# Altium PCB SP1100RS_V5.0.1.PcbDoc (part 2 of 2)
Units mm, origin at the board's own origin, x right, y up, seen from the top; angles counter-clockwise.
Board outline 126.12 x 87.13 mm, 4 copper layers (TopLayer, GND, PWR, BottomLayer); 167 components, 107 nets, 539 pads, 176 vias.
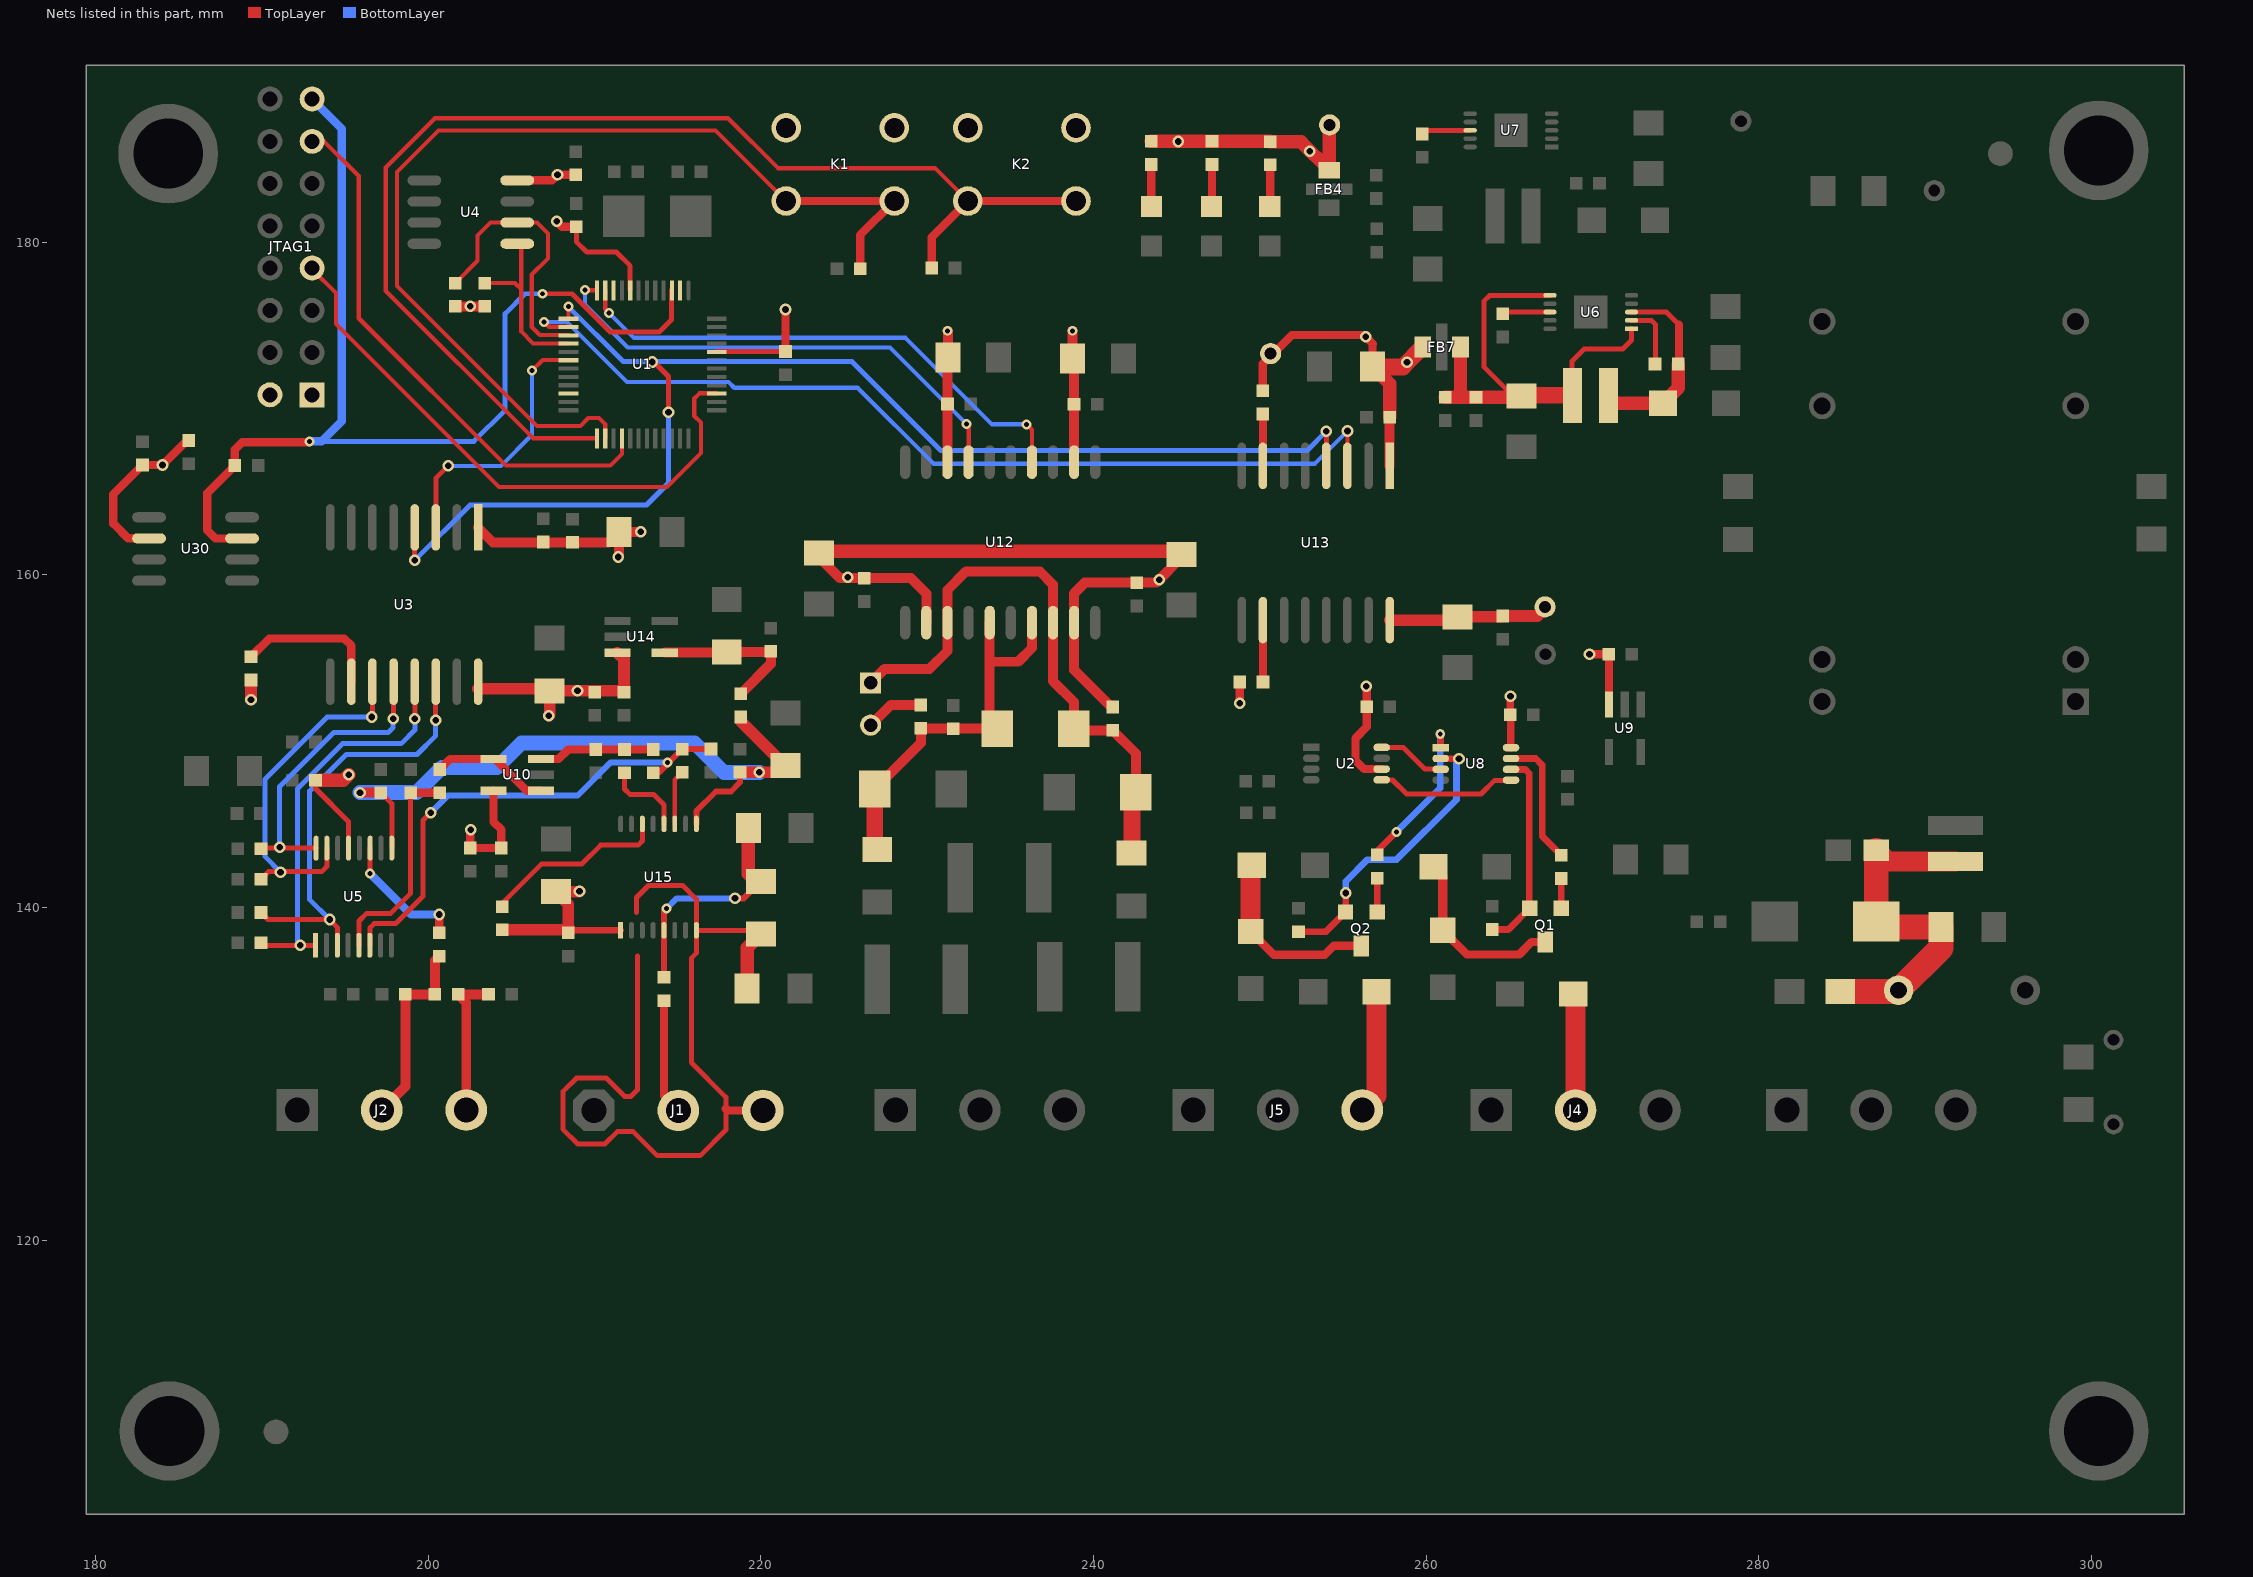
[diagram p4: the nets of this part, all layers, seen from the top]

## Via types
v1: diameter 0.7, hole 0.4, TopLayer to BottomLayer, 140 vias
v2: diameter 0.6, hole 0.3, TopLayer to BottomLayer, 32 vias
v3: diameter 1, hole 0.6, TopLayer to BottomLayer, 4 vias

## Nets (pads, with @x,y where several pads share a name; then routed paths per layer and width w, separated by ;. In a path a pad name is that pad's centre, name@x,y a point inside that pad or via, vN(x,y) a via of type N, cw(c..) or ccw(c..) an arc to the next point about the centre after c; other vN are vias at no path point) (continued)
NetC18_1: C18.1 R19.2 U5.5 | length 13.1
  TopLayer w0.3: U5.5@195.839,137.729 195.839,139.189 196.3,139.65 197.75,139.65 198.95,140.85 C18.1@198.95,146.9
  TopLayer w0.5: C18.1@198.95,146.9 198.953,146.903 R19.2@200.7,146.903
NetC19_1: C19.1 C20.1 FB6.1 U14.4 | length 9.7
  TopLayer w0.6: U14.4@214.225,155.325 217.923,155.325 C19.1@217.95,155.352 220.552,155.352 C20.1@220.6,155.4 220.6,154.65 FB6.1@218.8,152.85
NetC22_1: C22.1 U6.2 | length 4
  TopLayer w0.3: U6.2@272.318,175.306 273.543,175.306 273.805,175.044 C22.1@273.805,172.675
NetC22_2: C22.2 D49.2 L1.1 U6.3 | length 11.8
  TopLayer w0.3: U6.3@272.318,175.806 274.44,175.806 275.202,175.044
  TopLayer w0.5: C22.2@275.202,172.675 275.202,175.044
  TopLayer w0.8: L1.1@270.96,170.775 271.423,170.312 D49.2@274.236,170.312 275.157,171.233 C22.2@275.157,172.675
NetC23_1: C23.1 C51.1 FB7.1 L1.2 U6.1 U6.6 VR3.2 | length 29.5
  TopLayer w0.3: C23.1@265.185,170.8 263.475,172.51 263.475,176.45 263.825,176.8 U6.6@267.45,176.8 ; L1.2@268.775,170.8 268.775,172.85 269.5,173.575 271.825,173.575 272.35,174.1 U6.1@272.35,174.8
  TopLayer w0.8: VR3.2@261.15,170.672 262.997,170.672 C51.1@263,170.675 ; FB7.1@262.065,173.692 262.065,170.685 262.075,170.675 C51.1@263,170.675 ; C23.1@265.725,170.75 265.65,170.675 C51.1@263,170.675
  TopLayer w1: C23.1@265.185,170.8 268.775,170.8 L1.2@268.8,170.775
NetC29_2: C29.2 C30.1 R20.2 U10.3 | length 7
  TopLayer w0.5: U10.3@206.775,148.925 207.85,148.925 208.422,149.497 C29.2@210.075,149.497 210.078,149.5 C30.1@213.525,149.5
NetC30_2: C30.2 C31.1 R25.2 U5.6 | length 29.8
  TopLayer w0.3: U5.6@196.489,137.729 196.489,138.764 196.75,139.025 198.036,139.025 199.675,140.664 199.675,145.225 v1(200.15,145.7)
  TopLayer w0.35: C30.2@213.525,148.103 213.856,148.103 R25.2@215.275,149.522 216.997,149.522 C31.1@217,149.525
  BottomLayer w0.35: v1(200.15,145.7) 201.175,146.725 208.975,146.725 210.975,148.725 v2(214.4,148.725)
NetC32_1: C32.1 C37.1 R24.2 U15.5 | length 14.2
  TopLayer w0.35: R24.2@214.175,135.797 U15.5@214.175,138.625 214.175,139.775 214.325,139.925 v2(214.325,139.95) ; v1(218.45,140.55) 218.977,140.55 219.851,141.424 C32.1@220,141.573
  TopLayer w0.8: C37.1@219.252,144.775 219.252,142.023 C32.1@219.851,141.424
  BottomLayer w0.35: v2(214.325,139.95) 214.325,139.925 214.95,140.55 v1(218.45,140.55)
NetC41_1: C41.1 CA11.1 D3.2 F3.2 L3.1 VR1.1 | length 21.8
  TopLayer w1.2: C41.1@287.065,143.442 287.732,142.775 L3.1@291.825,142.775
  TopLayer w1.5: F3.2@284.898,134.95 288.33,134.95 D3.2@288.405,135.025 290.952,137.572 VR1.1@290.952,138.825 287.375,138.825 CA11.1@287.05,139.15 287.065,139.165 C41.1@287.065,143.442
NetD1_2: D1.2 F1.1 Q1.3 | length 11.1
  TopLayer w0.5: F1.1@261,138.625 262.45,137.175 265.6,137.175 266.345,137.92 Q1.3@267.165,137.92
  TopLayer w0.6: D1.2@260.44,142.447 261,141.888 F1.1@261,138.625
NetD2_2: D2.2 F2.1 Q2.3 | length 11.5
  TopLayer w0.5: F2.1@249.45,138.554 250.854,137.15 253.9,137.15 254.445,137.695 Q2.3@256.098,137.695
  TopLayer w1.2: F2.1@249.45,138.554 249.45,142.482 D2.2@249.515,142.547
NetD4_2: D4.2 J4.2 | length 7
  TopLayer w1.2: D4.2@268.842,134.803 268.986,134.659 J4.2@268.986,127.823
NetD5_2: D5.2 J5.3 | length 7.5
  TopLayer w1.2: J5.3@256.159,127.823 257.017,128.681 D5.2@257.017,134.928
NetF10_1: F10.1 R41.2 T1.1 U12.13 U12.18 ZD14.1 ZD15.1 | length 36.2
  TopLayer w0.6: T1.1@226.6,153.5 227.45,154.35 230.15,154.35 231.22,155.42 U12.13@231.22,157.123 231.22,159.095 232.325,160.2 236.779,160.2 237.57,159.409 U12.18@237.57,157.123 237.57,153.605 238.825,152.35 ZD14.1@238.825,150.75 238.922,150.653 R41.2@241.15,150.653 242.55,149.253 ZD15.1@242.55,146.925 ; F10.1@242.316,142.94 F10.1@242.316,143.29
  TopLayer w1: F10.1@242.316,143.29 242.316,146.691 ZD15.1@242.55,146.925
NetF11_1: F11.1 R42.1 R76.1 U12.15 U12.17 ZD14.2 ZD16.2 | length 24.1
  TopLayer w0.6: ZD16.2@226.85,147.125 229.625,149.9 R76.1@229.625,150.775 ZD14.2@234.2,150.775 ; U12.15@233.76,157.123 233.76,154.95 ; ZD14.2@234.225,150.75 ZD14.2@234.2,150.775 ; U12.17@236.3,157.123 236.3,155.6 235.475,154.775 233.935,154.775 233.76,154.95 ; 233.76,154.95 233.76,151.215 ZD14.2@234.2,150.775
  TopLayer w1: ZD16.2@226.85,147.125 226.85,143.574 F11.1@226.949,143.475
NetLD1_A: LD1.A R18.1 | length 2.5
  TopLayer w0.5: R18.1@250.625,184.65 250.625,182.225 LD1.A@250.65,182.2
NetLD2_A: LD2.A R17.1 | length 2.5
  TopLayer w0.5: R17.1@243.475,184.675 243.475,182.191 LD2.A@243.49,182.176
NetLD3_A: LD3.A R52.1 | length 2.5
  TopLayer w0.5: LD3.A@247.115,182.151 247.125,182.161 R52.1@247.125,184.675
NetQ1_1: Q1.1 R7.1 | length 1.8
  TopLayer w0.4: Q1.1@268.13,139.952 R7.1@268.13,141.738
NetQ1_2: Q1.2 R5.1 U8.6 | length 12.1
  TopLayer w0.4: R5.1@263.975,138.675 264.948,138.675 Q1.2@266.225,139.952 266.192,139.985 266.192,148.07 265.968,148.294 U8.6@265.088,148.294
NetQ2_1: Q2.1 R13.1 | length 2
  TopLayer w0.4: Q2.1@257.063,139.727 R13.1@257.063,141.765
NetQ2_2: Q2.2 R4.1 U8.2 | length 17.5
  TopLayer w0.4: R4.1@252.325,138.55 253.981,138.55 Q2.2@255.158,139.727 255.158,140.858 v1(255.175,140.875) ; U8.2@260.858,148.944 261.969,148.944 v1(261.975,148.95)
  BottomLayer w0.4: v1(255.175,140.875) 255.175,141.575 256.475,142.875 258.225,142.875 261.825,146.475 261.825,148.8 v1(261.975,148.95)
NetR2_2: R2.2 U5.11 | length 7.8
  TopLayer w0.3: v2(196.5,142.05) 196.511,142.061 U5.11@196.511,143.571
  TopLayer w0.5: R2.2@200.675,138.472 v1(200.675,139.575)
  BottomLayer w0.5: v2(196.5,142.05) 198.975,139.575 v1(200.675,139.575)
NetR7_2: R7.2 U8.7 | length 7.9
  TopLayer w0.4: U8.7@265.106,148.958 266.592,148.958 266.975,148.575 266.975,144.29 R7.2@268.13,143.135
NetR8_2: R8.2 U6.8 | length 2.9
  TopLayer w0.3: R8.2@264.61,175.7 264.71,175.8 U6.8@267.45,175.8
NetR11_2: R11.2 U7.8 | length 3
  TopLayer w0.3: R11.2@259.775,186.5 260,186.725 U7.8@262.65,186.725
NetR13_2: R13.2 U8.1 | length 9.6
  TopLayer w0.4: R13.2@257.063,143.162 257.063,143.388 v2(258.225,144.55) ; U8.1@260.876,149.608 v2@260.876,150.399
  BottomLayer w0.4: v2(258.225,144.55) 260.85,147.175 v2(260.85,150.425)
NetR16_1: R16.1 U15.14 | length 11.2
  TopLayer w0.3: R16.1@204.45,140.05 204.45,140.25 206.825,142.625 209.25,142.625 210.375,143.75 212.625,143.75 212.875,144 U15.14@212.875,145.025
NetR19_1: R19.1 U10.1 U10.4 | length 7.1
  TopLayer w0.5: R19.1@200.7,148.3 201.325,148.925 U10.4@203.925,148.925 204.025,148.925 205.925,147.025 U10.1@206.775,147.025
NetR20_1: R20.1 U15.12 | length 4.9
  TopLayer w0.3: R20.1@211.8,148.1 211.8,147.125 212.125,146.8 213.55,146.8 214.175,146.175 U15.12@214.175,145.025
NetR23_1: R23.1 U3.10 | length 8.8
  TopLayer w0.5: R23.1@189.35,155.075 190.45,156.175 194.95,156.175 195.38,155.745 U3.10@195.38,153.579
NetR25_1: R25.1 U15.11 | length 3.3
  TopLayer w0.3: U15.11@214.825,145.025 214.825,147.675 R25.1@215.275,148.125
NetR70_1: R70.1 U13.7 | length 3
  TopLayer w0.5: U13.7@250.19,166.55 R70.1@250.19,169.576
NetR71_2: R71.2 U13.10 | length 3.7
  TopLayer w0.5: R71.2@250.19,153.556 U13.10@250.19,157.279
NetR76_2: R76.2 T1.2 | length 3.5
  TopLayer w0.6: T1.2@226.6,150.96 227.812,152.172 R76.2@229.625,152.172
NetU2_5: U2.5 U8.5 | length 8.4
  TopLayer w0.3: U2.5@257.341,147.669 257.982,147.669 258.826,146.825 263.3,146.825 264.119,147.644 U8.5@265.088,147.644
NetU2_8: U2.8 U8.3 | length 4.1
  TopLayer w0.3: U2.8@257.341,149.619 258.631,149.619 259.931,148.319 U8.3@260.858,148.319
PH-CMP: C32.2 C36.1 J1.3 U15.8 | length 57.3
  TopLayer w0.3: 212.525,139.7 212.525,140.6 213.25,141.325 215.3,141.325 216.125,140.5 U15.8@216.125,138.625 ; 212.575,137.075 212.575,129.025 212.2,128.65 211.8,128.65 210.7,129.75 208.925,129.75 208.1,128.925 208.1,126.675 209,125.775 210.625,125.775 211.375,126.525 212.325,126.525 213.775,125.075 216.35,125.075 217.9,126.625 217.9,127.9 217.9,128.6 215.825,130.675 215.825,136.95 216.125,137.25 U15.8@216.125,138.625 ; C32.2@220,138.398 219.773,138.625 U15.8@216.125,138.625
  TopLayer w0.5: 217.9,127.9 218.002,127.798 J1.3@220.122,127.798
  TopLayer w0.8: C36.1@219.177,135.125 219.177,137.575 C32.2@220,138.398
PH-INP: J1.2 R24.1 | length 7
  TopLayer w0.5: R24.1@214.175,134.4 214.175,128.665 J1.2@215.042,127.798
R\E\S\E\T\: JTAG1.15 R68.2 U1.3 U30.7 | length 66.9
  TopLayer w0.3: v2(206.875,176.9) 208.65,176.9 210.95,174.6 213.889,174.6 214.642,175.353 U1.3@214.642,177.115
  TopLayer w0.5: U30.7@188.809,162.19 187.21,162.19 186.725,162.675 186.725,164.922 R68.2@188.378,166.575 188.378,167.528 188.825,167.975 192.825,167.975 v2(192.875,168.025)
  BottomLayer w0.3: v2(192.875,168.025) 202.75,168.025 204.625,169.9 204.625,173.575 204.625,175.7 205.825,176.9 v2(206.875,176.9)
  BottomLayer w0.5: v2(192.875,168.025) 193.6,168.025 194.8,169.225 194.8,186.83 JTAG1.15@193.025,188.605
REF2.5V: C33.1 C34.1 C35.1 FB6.2 U5.9 U15.9 | length 42.5
  TopLayer w0.3: C35.1@197.15,146.9 197.811,146.239 U5.9@197.811,143.571
  TopLayer w0.35: U15.9@216.125,145.025 216.125,145.8 217.3,146.975 218.2,146.975 218.75,147.525 C33.1@218.75,148.125
  TopLayer w0.6: v1(195.9,146.9) C35.1@197.15,146.9
  TopLayer w0.7: C33.1@218.75,148.125 v1(219.912,148.125) 221.073,148.125 C34.1@221.475,148.527 218.8,151.202 FB6.2@218.8,151.453
  BottomLayer w0.9: v1(195.9,146.9) 199.3,146.9 200.825,148.425 204.15,148.425 205.625,149.9 216,149.9 217.775,148.125 v1(219.912,148.125)
RX485: U1.11 U12.4 | length 31.7
  TopLayer w0.25: U1.11@210.642,177.115 210.642,175.983 v2(210.875,175.75) ; v2(235.975,169.05) 236.3,168.725 U12.4@236.3,166.775
  BottomLayer w0.25: v2(210.875,175.75) 212.375,174.25 228.7,174.25 233.9,169.05 v2(235.975,169.05)
SCK0: U1.22
SCK1: U1.13 U3.4 U13.4 | length 79.3
  TopLayer w0.25: v2(208.425,176.125) 208.442,176.108 U1.13@208.442,175.415
  TopLayer w0.3: U3.4@199.19,162.85 199.19,160.885 v1(199.2,160.875) ; v1(213.475,172.8) 213.575,172.8 214.45,171.925 v1(214.45,169.775) ; U13.4@254,166.55 v1(254,168.625)
  BottomLayer w0.3: v1(199.2,160.875) 202.525,164.2 213.125,164.2 214.45,165.525 v1(214.45,169.775) ; v2(208.425,176.125) 211.725,172.825 v1@213.475,172.825 ; v1(213.475,172.8) v1@213.475,172.825 ; v1(254,168.625) 252.85,167.475 230.825,167.475 225.475,172.825 v1@213.475,172.825
SCL: R14.1 U1.15 U4.6 | length 16.7
  TopLayer w0.25: R14.1@201.631,177.541 202.975,178.885 202.975,180.4 203.754,181.179 U4.6@205.355,181.179 206.546,181.179 207.2,180.525 207.2,179.025 206.225,178.05 206.225,174.9 206.71,174.415 U1.15@208.442,174.415
SDA: R15.1 U1.16 U4.5 | length 10.9
  TopLayer w0.25: R15.1@203.409,177.541 205.204,177.541 205.6,177.144 ; U4.5@205.355,179.909 205.6,179.664 205.6,177.144 ; U1.16@208.442,173.915 206.31,173.915 205.6,174.625 205.6,177.144
SPI_CS: R6.2 U3.14 U5.3 | length 26.5
  TopLayer w0.3: R6.2@189.947,139.7 190.372,139.275 v1(194.075,139.275) 194.539,138.811 U5.3@194.539,137.729 ; v1(200.45,151.25) 200.45,153.569 U3.14@200.46,153.579
  BottomLayer w0.3: v1(194.075,139.275) 192.875,140.475 192.875,147 195.075,149.2 199.325,149.2 200.45,150.325 v1(200.45,151.25)
SPI_DIN: R10.2 U3.12 U5.16 | length 18
  TopLayer w0.3: R10.2@189.947,143.525 189.993,143.571 U5.16@193.261,143.571 ; v1(197.9,151.35) 197.92,151.37 U3.12@197.92,153.579
  BottomLayer w0.3: v1(191.075,143.625) 191.075,147.275 194.325,150.525 197.6,150.525 197.9,150.825 v1(197.9,151.35)
SPI_DOUT: R12.2 U3.11 U5.15 | length 21.5
  TopLayer w0.3: R12.2@189.947,141.7 190.397,142.15 193.6,142.15 193.911,142.461 U5.15@193.911,143.571 ; v1(196.6,151.45) 196.65,151.5 U3.11@196.65,153.579
  BottomLayer w0.3: v1(191.125,142.125) 190.175,143.075 190.175,147.7 193.925,151.45 v1(196.6,151.45)
SPI_SCLK: R9.2 U3.13 U5.1 | length 24.3
  TopLayer w0.3: R9.2@189.947,137.875 190.093,137.729 v1(192.3,137.729) U5.1@193.239,137.729 ; U3.13@199.19,153.579 199.2,153.569 v1(199.2,151.35)
  BottomLayer w0.3: v1(192.3,137.729) 192.15,137.879 192.15,147.15 194.85,149.85 198.375,149.85 199.2,150.675 v1(199.2,151.35)
SSEL0: U1.10
SSEL1: U1.18 U3.3 | length 16.1
  TopLayer w0.25: v2(206.25,172.275) 206.89,172.915 U1.18@208.442,172.915
  TopLayer w0.3: U3.3@200.46,162.85 200.46,165.81 v1(201.2,166.55)
  BottomLayer w0.25: v1(201.2,166.55) 204.375,166.55 206.25,168.425 v2(206.25,172.275)
SSEL1_A: U1.2
SSEL1_B: U1.14 U13.3 | length 56.3
  TopLayer w0.25: v2(206.975,175.2) 207.26,174.915 U1.14@208.442,174.915 ; U13.3@255.27,166.55 255.27,168.645 v1(255.275,168.65)
  BottomLayer w0.25: v2(206.975,175.2) 208.35,175.2 211.95,171.6 218.05,171.6 218.4,171.25 225.825,171.25 230.4,166.675 253.3,166.675 v1(255.275,168.65)
SW_S1: K1.2 R73.2 U1.26 | length 61.7
  TopLayer w0.25: U1.26@210.642,168.215 210.642,169.058 210.275,169.425 209.625,169.425 209.15,168.95 206.55,168.95 198.125,177.375 198.125,184.225 200.625,186.725 217.276,186.725 K1.2@221.526,182.475
  TopLayer w0.5: K1.2@221.526,182.475 K1.2@228.026,182.475 225.975,180.424 R73.2@225.975,178.4
SW_S2: K2.2 R74.2 U1.25 | length 73.5
  TopLayer w0.25: U1.25@210.142,168.215 206.31,168.215 197.45,177.075 197.45,184.5 200.4,187.45 218.025,187.45 221.025,184.45 230.473,184.45 K2.2@232.448,182.475
  TopLayer w0.5: R74.2@230.278,178.45 230.278,180.305 K2.2@232.448,182.475 K2.2@238.948,182.475
SWDIO: JTAG1.7 U1.39 | length 35.7
  TopLayer w0.25: JTAG1.7@193.025,178.445 193.025,178.375 194.45,176.95 194.45,175.075 204.25,165.275 214.35,165.275 216.4,167.325 216.4,169.15 216,169.55 216,170.6 216.315,170.915 U1.39@217.342,170.915
SWO: JTAG1.13 U1.28 | length 32.9
  TopLayer w0.25: JTAG1.13@193.025,186.065 193.735,186.065 195.825,183.975 195.825,175.425 204.675,166.575 210.95,166.575 211.65,167.275 U1.28@211.65,168.2
TP-IN+: J2.2 R2.1 R3.1 R21.2 | length 11.7
  TopLayer w0.6: J2.2@197.21,127.823 198.625,129.238 R3.1@198.625,134.775 R21.2@200.403,134.775 200.403,136.803 R2.1@200.675,137.075
TP-IN-: J2.3 R21.1 R22.1 | length 9
  TopLayer w0.6: J2.3@202.29,127.823 202.29,134.285 R21.1@201.8,134.775 R22.1@203.625,134.775
TX485: U1.12 U12.7 | length 29.9
  TopLayer w0.25: v2(209.425,177.125) 209.435,177.115 U1.12@210.142,177.115 ; v2(232.375,169.075) 232.5,168.95 232.5,166.785 U12.7@232.49,166.775
  BottomLayer w0.25: v2(209.425,177.125) 209.425,176.25 212,173.675 227.775,173.675 v2(232.375,169.075) v2@232.375,169.025
V5_ISO: C2.1 C5.1 C53.1 C57.1 CA5.1 R71.1 TP2.1 U2.6 U8.8 U9.3 U13.16 | length 24.9
  TopLayer w0.457: C2.1@265.049,151.593 265.049,152.674 v1(265.075,152.7) ; U8.8@265.088,149.594 C2.1@265.088,151.575
  TopLayer w0.5: v1(248.793,152.286) R71.1@248.793,153.556 ; v1@256.425,153.275 C5.1@256.425,152.075 256.425,150.85 255.75,150.175 255.75,148.85 256.277,148.323 U2.6@257.328,148.323 ; C2.1@265.049,151.593 C2.1@265.075,151.619 ; v1(269.825,155.225) C53.1@270.975,155.225 271,155.2 U9.3@271,152.2
  TopLayer w0.7: U13.16@257.81,157.279 261.704,157.279 CA5.1@261.9,157.475 264.55,157.475 C57.1@264.6,157.525 266.7,157.525 TP2.1@267.25,158.075
  other v1: 256.4,153.3
V330_D: C3.1 C4.1 C27.1 C28.1 C43.1 C44.1 CA13.1 CA14.1 FB4.2 JTAG1.1 JTAG1.2 K1.1 K2.1 R14.2 R15.2 R17.2 R18.2 R52.2 R69.2 TP5.1 U1.8 U1.44 U4.8 U12.2 U12.8 U30.2 | length 60
  TopLayer w0.3: C4.1@208.911,180.925 208.911,180.036 209.546,179.401 211.324,179.401 212.142,178.583 U1.8@212.142,177.115 ; U1.44@217.342,173.432 C3.1@221.625,173.432
  TopLayer w0.5: U30.2@183.221,162.19 183.211,162.2 181.95,162.2 181.075,163.075 181.075,164.85 C27.1@182.825,166.6 v1(184.025,166.6) 185.497,168.072 R69.2@185.6,168.072 ; U4.8@205.355,183.719 207.444,183.719 v1(207.775,184.05) C28.1@208.85,184.05 ; v1(207.725,181.25) 208.05,180.925 C4.1@208.911,180.925 ; C3.1@221.484,173.432 v1(221.484,175.95)
  TopLayer w0.6: R14.2@201.631,176.144 R15.2@203.409,176.144 ; U12.8@231.22,166.775 CA14.1@231.22,173.29 ; CA14.1@231.25,173.075 v2@231.25,174.65 ; v2(238.75,174.675) CA13.1@238.75,173 238.825,172.925 C43.1@238.825,170.25 ; U12.2@238.84,166.775 C43.1@238.84,170.25
  TopLayer w0.8: R17.2@243.475,186.072 250.6,186.072 R18.2@250.625,186.047 252.5,186.047 252.5,186.013 254.167,184.346 254.167,187.017 TP5.1@254.2,187.05
  other v1: 202.525,176.15 253,185.475 245.1,186.05
  other v2: 231.225,174.675
V500_A: C1.1 C9.2 C56.1 CA1.1 CA4.1 FB7.2 R70.2 TP6.1 U3.1 U13.1 | length 32.3
  TopLayer w0.5: R70.2@250.175,171.072 250.175,172.675 251.925,174.425 256.25,174.425 256.8,173.875 256.773,173.848 CA4.1@256.773,172.525
  TopLayer w0.6: U3.1@203,162.85 203.897,161.953 C9.2@208.675,161.953 210.855,161.953 CA1.1@211.477,162.575 ; v1@211.477,161.127 CA1.1@211.477,162.575 ; v1@212.75,162.575 CA1.1@211.477,162.575 ; U13.1@257.81,166.55 C56.1@257.81,169.471
  TopLayer w0.8: CA4.1@256.773,172.525 256.798,172.5 257.81,171.488 C56.1@257.81,169.471
  TopLayer w1: CA4.1@256.798,172.5 258.625,172.5 258.625,172.536 FB7.2@259.789,173.7
  other v1: 211.425,161.075 212.775,162.6 258.85,172.775 256.375,174.325
VCC_COM: C45.1 C46.2 CA15.1 CA16.1 R41.1 U12.12 U12.19 | length 46.4
  TopLayer w0.6: CA15.1@223.5,161.05 224.753,159.797 C45.1@226.225,159.797 229.028,159.797 229.95,158.875 U12.12@229.95,157.123 ; R41.1@241.15,152.05 241.075,152.05 238.84,154.285 U12.19@238.84,157.123 238.84,158.89 239.475,159.525 C46.2@242.6,159.525 243.775,159.525 CA16.1@245.3,161.05
  TopLayer w0.8: CA15.1@223.5,161.05 223.875,161.425 244.925,161.425 CA16.1@245.3,161.05
  other v1: 243.95,159.7 225.225,159.85
VDD_ISO: C8.1 C12.1 C14.1 C24.1 C25.1 C38.1 CA2.1 FB1.1 R16.2 R23.2 U3.16 U5.13 U10.5 U14.3 U15.1 | length 39.1
  TopLayer w0.3: FB1.1@193.225,147.65 193.225,147.15 195.211,145.164 U5.13@195.211,143.571
  TopLayer w0.4: C25.1@208.575,138.625 U15.1@211.575,138.625
  TopLayer w0.5: v1(202.55,144.675) 202.525,144.65 C14.1@202.525,143.575 C12.1@204.4,143.575 204.4,144.675 203.925,145.15 U10.5@203.925,147.025
  TopLayer w0.7: v1(189.35,152.5) R23.2@189.35,153.678 ; U3.16@203,153.154 207.173,153.154 CA2.1@207.3,153.027 ; R16.2@204.45,138.653 C25.1@208.425,138.653 ; v1(207.25,151.525) 207.3,151.575 CA2.1@207.3,153.027 ; C25.1@208.425,138.475 C25.1@208.425,138.653 ; C25.1@208.575,138.625 208.547,138.653 C25.1@208.425,138.653 ; v1(209.1,140.975) 209.077,140.952 C24.1@207.675,140.952 208.425,140.202 C25.1@208.425,138.653 ; U14.3@211.375,155.325 211.775,154.925 C38.1@211.775,152.95 211.698,153.027 v1(208.975,153.027) CA2.1@207.3,153.027
  TopLayer w0.8: FB1.1@193.225,147.65 194.9,147.65 v1(195.225,147.975)
pads on no net: J2.1 JTAG1.3 JTAG1.5 JTAG1.11 U1.1 U1.19 U1.20 U1.21 U1.23 U1.24 U1.27 U1.31 U1.36 U1.40 U1.42 U1.43 U1.45 U1.48 U3.7 U5.2 U5.4 U6.5 U6.7 U6.9 U7.5 U7.7 U7.9 U9.1 U9.5 U11.9 U11.11 U13.6 U13.11 U14.1 U14.5 U15.2 U15.3 U15.6 U15.7 U30.4 U30.5 U30.6 U30.8

## Polygon pours and split planes (outlines as drawn)
IAGND on BottomLayer "Top Layer-No Net" (hatched 90Degree grid 0.3 track 0.3, remove dead copper, pour order 15): 247.425,139.7 276.35,139.7 276.575,139.92 276.575,157.05 247.575,157.05 247.425,156.903
GND_ISO on BottomLayer "Top Layer-No Net" (hatched 90Degree grid 0.3 track 0.3, remove dead copper, pour order 12): 184.525,132.65 205.7,132.65 206.85,133.788 210.3,137.2 210.3,142.74 210.3,144.372 210.35,144.422 223.2,144.422 223.275,144.348 223.275,155.551 220.9,157.9 187.15,157.9 184.6,155.377
GND on BottomLayer "Top Layer-No Net" (hatched 90Degree grid 0.3 track 0.3, remove dead copper, pour order 9): 257.473,175.8 222.373,175.8 219.473,178.7 218.899,179.274 218.899,185 218.899,186.299 218.898,186.3 218.898,190 218.973,190.075 188.248,190.075 188.173,190 188.173,160.05 188.248,159.975 215.098,159.975 217.773,162.65 218.748,163.625 243.598,163.625 256.848,163.625 257.398,164.175
EARTH on BottomLayer "Top Layer-No Net" (hatched 90Degree grid 0.3 track 0.3, remove dead copper, pour order 20): 180.275,123.3 304.425,123.3 304.425,104.573 180.3,104.573 180.275,104.525
IAGND on TopLayer "Top Layer-No Net" (hatched 90Degree grid 0.3 track 0.3, remove dead copper, pour order 15): 247.3,139.65 276.225,139.65 276.45,139.87 276.45,157 247.45,157 247.3,156.853
GND_ISO on TopLayer "Top Layer-No Net" (hatched 90Degree grid 0.3 track 0.3, remove dead copper, pour order 12): 184.525,132.75 205.7,132.75 206.85,133.888 210.3,137.3 210.3,142.84 210.3,144.472 210.35,144.522 223.2,144.522 223.275,144.448 223.275,155.651 220.9,158 187.15,158 184.6,155.477
GND on TopLayer "Top Layer-No Net" (hatched 90Degree grid 0.3 track 0.3, remove dead copper, pour order 9): 257.475,175.9 222.375,175.9 219.475,178.8 218.901,179.374 218.901,185.1 218.901,186.399 218.9,186.4 218.9,190.1 218.975,190.175 188.25,190.175 188.175,190.1 188.175,160.15 188.25,160.075 215.1,160.075 217.775,162.75 218.75,163.725 243.6,163.725 256.85,163.725 257.4,164.275
+24V on TopLayer "Top Layer-No Net" (hatched 90Degree grid 0.3 track 0.3, remove dead copper, pour order 14): 285.025,173.75 285.025,185.75 284.95,185.825 280.225,185.825 280.2,185.85 280.2,175.025 281.45,173.775
GND on TopLayer "Top Layer-No Net" (hatched 90Degree grid 0.3 track 0.3, remove dead copper, pour order 15): 283.375,172.1 289.801,172.1 293.232,168.52 293.866,167.858 298.5,167.858 298.5,164.985 297.604,164.05 292.817,164.05 288.992,168.041 288.664,168.383 283.419,168.383
24VGND_IN on TopLayer "Top Layer-No Net" (hatched 90Degree grid 0.3 track 0.3, remove dead copper, pour order 17): 296.925,161.325 296.925,150.2 296.95,150.175 296.95,149.65 296.925,149.625 301.45,149.625 301.45,161.175 301.3,161.325
NetC02_2 on TopLayer "Top Layer-No Net" (hatched 90Degree grid 0.3 track 0.3, remove dead copper, pour order 19): 281.65,157.3 281.65,151.5 282.8,150.35 283.175,149.975 285.475,149.975 286.8,148.65 290.9,148.65 290.9,149.15 288.1,151.95 285.525,154.525 285.525,157.25
NetC13_1 on TopLayer "Top Layer-No Net" (hatched 90Degree grid 0.3 track 0.3, remove dead copper, pour order 27): 255.975,182.872 264.675,182.872 264.7,182.9 264.7,178.405 264.75,178.35 262.575,178.35 261.7,179.321 261,180.098 255.975,180.098
NetC23_1 on TopLayer "Top Layer-No Net" (hatched 90Degree grid 0.3 track 0.3, remove dead copper, pour order 29): 260.1,171.825 264.27,171.825 264.862,172.4 265.3,172.825 269.624,172.825 269.624,169.2 269.65,169.175 265.197,169.175 264.425,169.925 264.27,170.075 260.1,170.075
IAGND on GND (split plane): 276.798,135.125 276.798,124.352 242.052,124.352 242.052,130.759 246.734,135.441 246.784,135.502 246.821,135.571 246.844,135.647 246.852,135.725 246.852,160.173 258.225,160.173 258.303,160.181 258.379,160.204 258.448,160.241 258.509,160.291 260.309,162.091 260.315,162.098 276.798,162.098
GND_COM on GND (split plane): 246.048,135.891 241.366,131.209 241.316,131.148 241.279,131.079 241.256,131.003 241.248,130.925 241.248,124.352 223.902,124.352 223.902,160.173 246.048,160.173
24VGND_IN on GND (split plane): 305.059,159.48 305.059,124.352 277.602,124.352 277.602,135.125 277.602,159.549
GND on GND (split plane): 305.059,167.153 277.275,167.2 277.275,162.895 277.2,162.902 260.427,162.902 260.427,175.7 260.419,175.778 260.396,175.854 260.359,175.923 260.309,175.984 259.284,177.009 259.223,177.059 259.154,177.096 259.078,177.119 259,177.127 249.9,177.127 249.822,177.119 249.746,177.096 249.677,177.059 249.616,177.009 249.566,176.948 249.529,176.879 249.506,176.803 249.498,176.725 249.506,176.647 249.529,176.571 249.566,176.502 249.616,176.441 249.677,176.391 249.746,176.354 249.822,176.331 249.9,176.323 258.834,176.323 259.623,175.534 259.623,162.541 258.059,160.977 217.5,160.977 217.422,160.969 217.346,160.946 217.277,160.909 217.216,160.859 215.209,158.852 179.96,158.852 179.96,190.139 305.059,190.139
GND_ISO on GND (split plane): 223.098,132.05 220.975,132.05 220.95,142.65 211.7,142.65 211.6,142.55 211.6,132.125 211.55,132.175 205.75,132.175 205.625,132.05 205.625,124.352 179.96,124.352 179.96,158.048 215.375,158.048 215.453,158.056 215.529,158.079 215.598,158.116 215.659,158.166 217.666,160.173 223.098,160.173
no net on GND (split plane): 305.059,104.032 179.96,104.032 179.96,123.548 205.625,123.548 205.625,122.575 223.125,122.575 223.35,122.8 223.35,123.548 241.515,123.548 241.572,123.531 241.65,123.523 241.728,123.531 241.785,123.548 305.059,123.548
+24V on PWR (split plane): 305.059,167.151 277.2,167.175 277.2,162.62 277.197,162.619 277.121,162.596 277.052,162.559 276.991,162.509 276.941,162.448 276.904,162.379 276.881,162.303 276.873,162.225 276.873,161.302 265.152,161.302 265.152,176.525 265.144,176.603 265.121,176.679 265.084,176.748 265.034,176.809 264.973,176.859 264.904,176.896 264.828,176.919 264.75,176.927 259.552,176.927 259.552,190.139 305.059,190.139
V5_ISO on PWR (split plane): 276.873,147.377 262.825,147.377 262.76,147.369 262.699,147.343 262.647,147.303 261.646,146.302 246.902,146.302 246.902,160.498 276.873,160.498
IREF2.5V on PWR (split plane): 276.873,136.627 246.902,136.627 246.902,145.798 261.75,145.798 261.815,145.806 261.876,145.832 261.928,145.872 262.929,146.873 276.873,146.873
+24V_IN on PWR (split plane): 305.059,124.277 241.902,124.277 241.902,130.771 246.459,135.327 246.5,135.323 246.578,135.331 246.654,135.354 246.723,135.391 246.784,135.441 246.834,135.502 246.871,135.571 246.894,135.647 246.902,135.725 246.902,136.123 276.964,136.123 276.991,136.091 277.052,136.041 277.121,136.004 277.197,135.981 277.275,135.973 277.353,135.981 277.429,136.004 277.498,136.041 277.559,136.091 277.609,136.152 277.646,136.221 277.669,136.297 277.677,136.375 277.677,159.45 305.059,159.474
VCC_COM on PWR (split plane): 246.098,135.725 246.102,135.684 241.472,131.053 241.432,131.001 241.406,130.94 241.398,130.875 241.398,124.277 224.477,124.277 224.477,159.909 225.066,160.498 246.098,160.498
V500_A on PWR (split plane): 264.348,161.302 224.9,161.302 224.822,161.294 224.746,161.271 224.677,161.234 224.616,161.184 223.791,160.359 223.741,160.298 223.729,160.277 214.975,160.277 214.897,160.269 214.821,160.246 214.752,160.209 214.691,160.159 213.334,158.802 205.152,158.802 205.152,163.359 207.291,165.498 240.425,165.498 240.503,165.506 240.579,165.529 240.648,165.566 240.709,165.616 251.216,176.123 264.348,176.123
V330_D on PWR (split plane): 258.748,176.927 251.05,176.927 250.972,176.919 250.896,176.896 250.827,176.859 250.766,176.809 240.259,166.302 207.125,166.302 207.047,166.294 206.971,166.271 206.902,166.234 206.841,166.184 204.466,163.809 204.416,163.748 204.379,163.679 204.356,163.603 204.348,163.525 204.348,158.802 179.96,158.802 179.96,190.139 258.748,190.139
no net on PWR (split plane): 305.059,104.032 179.96,104.032 179.96,123.773 205.65,123.773 205.65,122.6 223.15,122.6 223.375,122.825 223.375,123.773 241.503,123.773 241.524,123.757 241.585,123.731 241.65,123.723 241.715,123.731 241.776,123.757 241.797,123.773 305.059,123.773
VDD_ISO on PWR (split plane): 223.673,124.277 223.375,124.277 223.375,131.975 223.275,132.075 221,132.075 220.95,142.675 220.15,142.675 211.725,142.675 211.625,142.575 211.625,132.15 211.575,132.2 205.775,132.2 205.65,132.075 205.65,124.277 179.96,124.277 179.96,157.998 213.5,157.998 213.578,158.006 213.654,158.029 213.723,158.066 213.784,158.116 215.141,159.473 223.673,159.473

## Keep-outs
KeepOutLayer:
  lines w0.3: 179.442,103.522 179.442,190.522 192.442,190.522 292.442,190.522 305.442,190.522 305.442,103.522 292.442,103.522 192.442,103.522 179.442,103.522

## Other copper
GND (plane layer: these items are gaps in the copper):
  pour cut-out: 205.625,122.575 205.625,132.05 205.75,132.175 211.55,132.175 211.6,132.125 211.6,142.55 211.7,142.65 220.95,142.65 220.975,132.05 223.25,132.05 223.35,131.95 223.35,122.8 223.125,122.575
  pour cut-out: 277.275,167.2 306.65,167.15 306.7,167.2 306.7,159.65 306.875,159.475 277.275,159.55
  lines w0.5: 223.5,160.575 246.45,160.575
  lines w0.8: 179.5,158.45 215.375,158.45 217.5,160.575 223.5,160.575 ; 179.525,123.95 305.45,123.95 ; 223.5,124 223.5,160.575 ; 241.65,123.925 241.65,130.925 246.45,135.725 246.45,160.575 ; 249.9,176.725 259,176.725 260.025,175.7 260.025,162.375 258.225,160.575 223.5,160.575 ; 260.15,162.5 277.2,162.5 ; 277.2,123.95 277.2,135.125 277.2,162.475 305.425,162.475 305.625,162.675
PWR (plane layer: these items are gaps in the copper):
  pour cut-out: 205.65,122.6 205.65,132.075 205.775,132.2 211.575,132.2 211.625,132.15 211.625,142.575 211.725,142.675 220.15,142.675 220.95,142.675 221,132.075 223.275,132.075 223.375,131.975 223.375,122.825 223.15,122.6
  pour cut-out: 277.2,167.175 306.463,167.15 306.513,167.2 306.513,159.65 306.688,159.475 277.2,159.45
  lines w0.5: 179.492,124.025 305.442,124.025 ; 224.075,124.25 224.3,124.025 ; 241.65,123.975 241.65,130.875 246.5,135.725 ; 246.5,146.05 261.75,146.05 262.825,147.125 277.275,147.125 ; 246.525,136.375 277.275,136.375
  lines w0.8: 179.442,158.4 213.5,158.4 214.975,159.875 224.05,159.875 ; 204.75,158.425 204.75,163.525 207.125,165.9 240.425,165.9 251.05,176.525 259.15,176.525 ; 224.075,124.25 224.075,160.075 224.9,160.9 246.5,160.9 ; 246.5,135.725 246.5,160.9 ; 259.15,190.699 259.15,176.525 ; 277.275,136.375 277.275,162.225 305.4,162.225 ; 277.325,160.9 264.75,160.9 ; 246.5,160.9 264.75,160.9 ; 259.15,176.525 264.75,176.525 264.75,160.9

## Silkscreen, mask and mechanical layers (free items; w line width, h text height)
TopOverlay:
  lines w0.3: 225.171,110.874 226.187,113.033 227.838,113.033 ; 226.822,110.874 227.838,113.033 ; 227.838,113.75 227.838,113.033 ; 228.473,110.874 229.489,113.033 227.838,113.033 ; 243.078,110.874 244.094,113.033 245.745,113.033 ; 244.729,110.874 245.745,113.033 ; 245.688,113.158 245.688,113.875 ; 246.38,110.874 247.396,113.033 245.745,113.033 ; 271.145,110.874 272.161,113.033 273.812,113.033 ; 272.796,110.874 273.812,113.033 ; 273.763,113.083 273.763,113.8 ; 274.447,110.874 275.463,113.033 273.812,113.033 ; 288.711,110.674 289.727,112.833 291.378,112.833 ; 290.362,110.674 291.378,112.833 ; 291.313,112.958 291.313,113.675 ; 292.013,110.674 293.029,112.833 291.378,112.833
  text "+" at 288.425,141 h0.8
  text "+" at 228.092,129.54 h0.8 r180
  text "Temp+" at 196.157,122.095 h1.5 r270
  text "Temp-" at 201.507,122.045 h1.5 r270
  text "GUARD" at 208.982,121.945 h1.5 r270
  text "EARTH" at 227.025,121.895 h1.5 r270
  text "485D-" at 232.105,121.895 h1.5 r270
  text "485D+" at 237.312,121.895 h1.5 r270
  text "EARTH" at 244.831,121.895 h1.5 r270
  text "A(MA)-" at 249.987,121.895 h1.5 r270
  text "A(MA)+" at 255.27,121.895 h1.5 r270
  text "B(MA)-" at 262.915,121.895 h1.5 r270
  text "B(MA)+" at 268.3,121.895 h1.5 r270
  text "EARTH" at 273.075,121.895 h1.5 r270
  text "VCM" at 219.632,121.845 h1.5 r270
  text "+24V" at 280.625,121.85 h1.5 r270
  text "GND" at 285.875,121.85 h1.5 r270
  text "INP" at 214.407,121.795 h1.5 r270
  text "NC" at 191.475,121.75 h1.5 r270
  text "EARTH" at 290.692,121.695 h1.5 r270
  text "Sanpell_SP1100RS_V5.0.1 2017.12" at 219.85,106.9 h1
Mechanical1:
  lines w0.3: 181.014,185.323 309.298,185.323 ; 181.086,108.522 309.672,108.522 ; 184.442,108.522 184.442,195.483 ; 300.442,108.522 300.442,195.692
  lines w0.5: 186.348,127.823 291.846,127.823

## Dimensions
184.442,108.522 to 184.37,185.323 on Mechanical1
300.442,108.522 to 184.442,108.522 on Mechanical1
192.442,103.522 to 179.442,190.522 on Mechanical1
179.442,103.522 to 305.442,103.522 on Mechanical1